# Altium PCB FAR_Small_PCB_V1_0.PcbDoc
Units mm, origin at the board's own origin, x right, y up, seen from the top; angles counter-clockwise.
Board outline 86.87 x 139.83 mm, 4 copper layers (Top Layer, Mid-Layer 1, Mid-Layer 2, Bottom Layer); 66 components, 61 nets, 277 pads, 4 vias.
Unrouted connection lines stored in the file: 197.
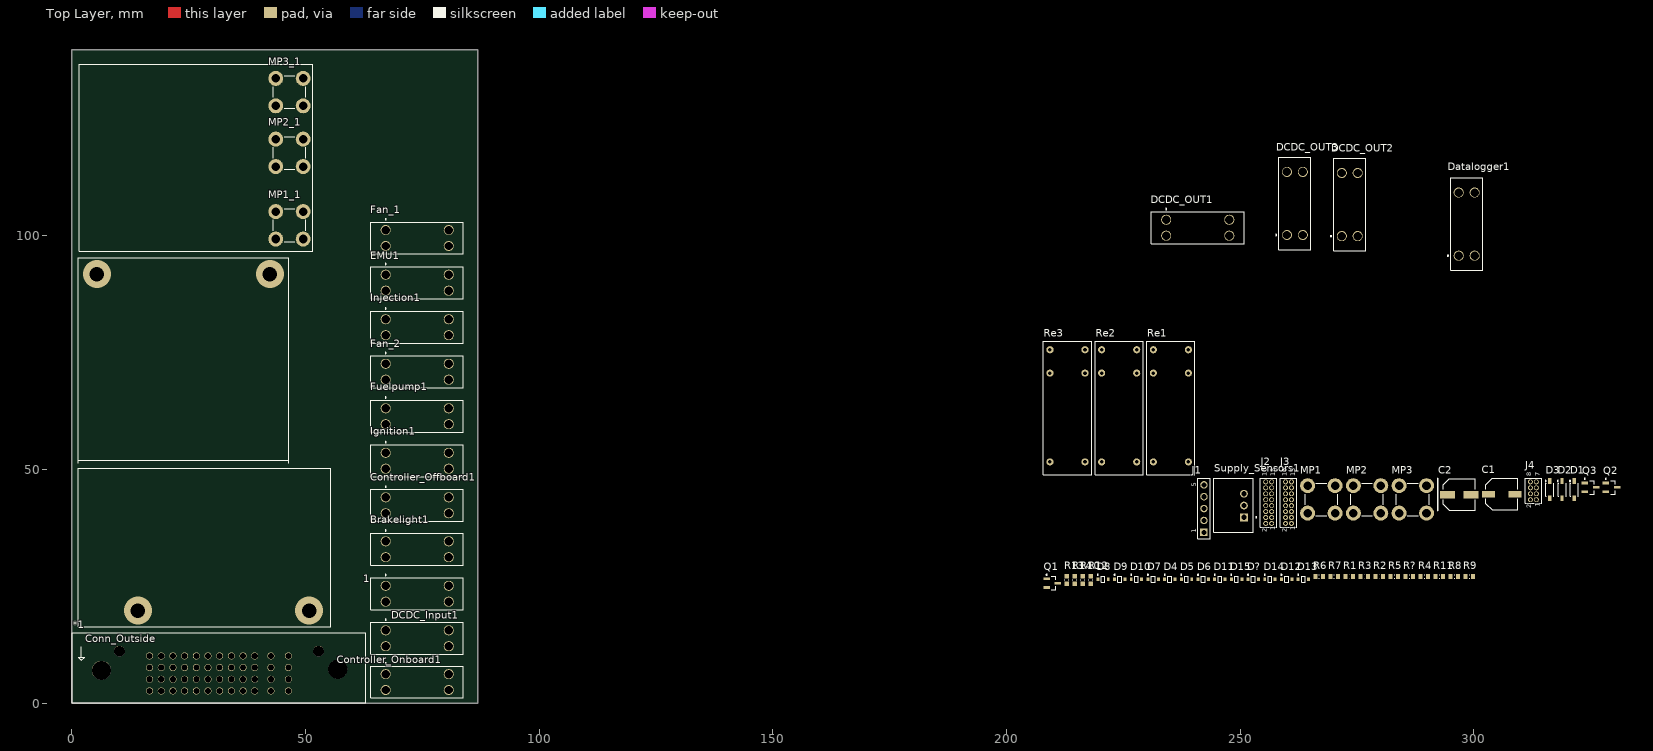
[diagram p0: Top Layer view]
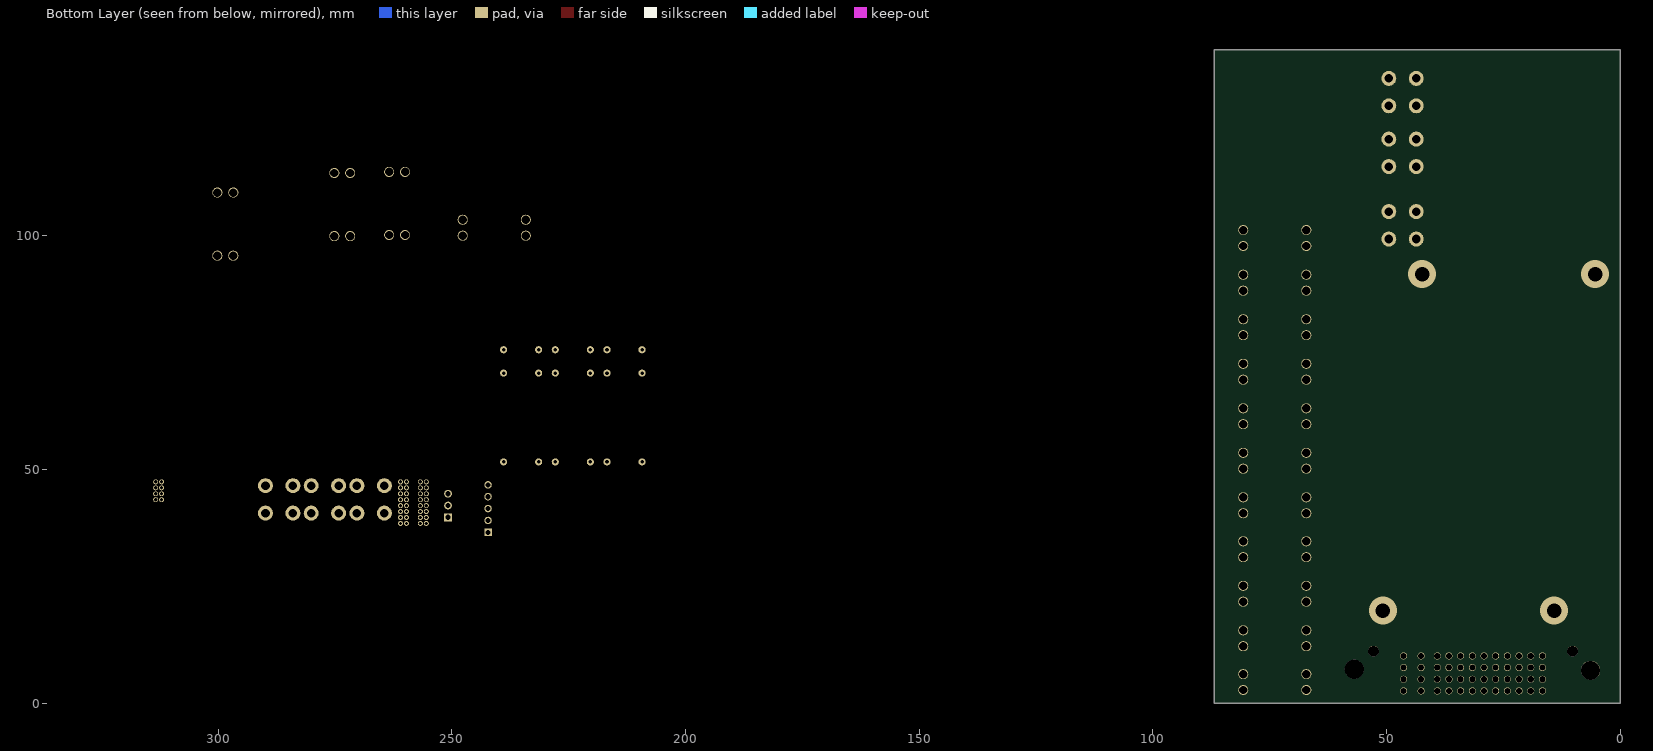
[diagram p1: Bottom Layer view, seen from below]

## Layer stack, top to bottom
Top Solder: solder mask 0.0102, Solder Resist, Dk 3.5
Top Layer: signal copper 0.0356
Dielectric 1: dielectric 0.32, FR-4, Dk 4.8
Mid-Layer 1: signal copper 0.0356
Dielectric3: dielectric 0.32, FR-4, Dk 4.8
Mid-Layer 2: signal copper 0.0356
Dielectric2: dielectric 0.32, FR-4, Dk 4.8
Bottom Layer: signal copper 0.0356
Bottom Solder: solder mask 0.0102, Solder Resist, Dk 3.5

## Board outline
0,0 86.868,0 86.868,139.827 0,139.827

## Design rules (kind name [scope] priority, off if disabled: settings)
Clearance [All] p1: gap=0.254 ignorepadtopadclearanceinfootprint=FALSE except(0: Arc-Hole Track-Hole SMDPad-Hole THPad-Hole Via-Hole Fill-Hole Poly-Hole Region-Hole Text-Hole)
PolygonConnect [All] p1: connectstyle=Relief reliefconductorwidth=0.254 reliefentries=4 polygonreliefangle="90 Angle" airgapwidth=0.254
RoutingVias [All] p1: holewidth=0.711 width=1.27 viastyle="Through Hole" minholewidth=0.711 minwidth=1.27 maxholewidth=0.711 maxwidth=1.27
SolderMaskExpansion [All] p1: expansion=0.102 istentingtop=FALSE
Width [All] p1: maxlimit=0.254 minlimit=0.254 preferedwidth=0.254
30 further rules are at their usual default settings.

## Classes and differential pairs
component class Fused_Inputs: D4 D5 D6 D7 D8 D9 D10 D11 D12 D13 D14 D15 D? R3 R4 R5 R6 R7 R8 R9 R10 R11 R12 R13 R14 R?
component class FAR_SMALL: 1 *1 Brakelight1 C1 C2 Controller_Offboard1 Controller_Onboard1 D1 D2 D3 Datalogger1 DCDC_Input1 DCDC_OUT1 DCDC_OUT2 DCDC_OUT3 EMU1 Fan_1 Fan_2 Fuelpump1 Ignition1 Injection1 J1 J2 J3 J4 MP1 MP2 MP3 Q1 Q2 Q3 R1 R2 Re1 Re2 Re3 Supply_Sensors1

## Components (designator, comment, footprint, x,y, rotation, side; value= is the part's Value field where it differs from the comment)
1 "3557-2" KSTN-3557-2 73.933,23.417 r0 top
*1 "Molex48PIN" PCBComponent_1 46.377,10.127 r0 top
Brakelight1 "3557-2" KSTN-3557-2 73.933,32.942 r0 top
C1 "EEEFK1C101P" PNSC-EEEFK1C101P_L 305.956,44.735 r0 top
C2 "EEEFK1E101XP" PNSC-FK-V-D8_V 296.87,44.635 r0 top
Controller_Offboard1 "3557-2" KSTN-3557-2 73.933,42.34 r0 top
Controller_Onboard1 "3557-2" KSTN-3557-2 73.933,4.523 r0 top
D1 "BAT46W-7-F" DIOD-SOD-123-2_V 321.464,45.683 r90 top
D2 "BAT46W-7-F" DIOD-SOD-123-2_V 318.856,45.683 r90 top
D3 "BAT46W-7-F" DIOD-SOD-123-2_V 316.248,45.683 r90 top
D4 "MM3Z4V7T1G" ONSC-SOD-323-2-477-02_V 234.944,26.512 r0 top
D5 "MM3Z4V7T1G" ONSC-SOD-323-2-477-02_V 238.516,26.512 r0 top
D6 "MM3Z4V7T1G" ONSC-SOD-323-2-477-02_V 242.087,26.512 r0 top
D7 "MM3Z4V7T1G" ONSC-SOD-323-2-477-02_V 231.373,26.512 r0 top
D8 "MM3Z4V7T1G" ONSC-SOD-323-2-477-02_V 220.66,26.512 r0 top
D9 "MM3Z4V7T1G" ONSC-SOD-323-2-477-02_V 224.231,26.512 r0 top
D10 "MM3Z4V7T1G" ONSC-SOD-323-2-477-02_V 227.802,26.512 r0 top
D11 "MM3Z4V7T1G" ONSC-SOD-323-2-477-02_V 245.658,26.512 r0 top
D12 "MM3Z4V7T1G" ONSC-SOD-323-2-477-02_V 259.943,26.512 r0 top
D13 "MM3Z4V7T1G" ONSC-SOD-323-2-477-02_V 263.514,26.512 r0 top
D14 "MM3Z4V7T1G" ONSC-SOD-323-2-477-02_V 256.372,26.512 r0 top
D15 "MM3Z4V7T1G" ONSC-SOD-323-2-477-02_V 249.229,26.512 r0 top
D? "MM3Z4V7T1G" ONSC-SOD-323-2-477-02_V 252.8,26.512 r0 top
Datalogger1 "3557-2" KSTN-3557-2 298.45,102.489 r90 top
DCDC_Input1 "3557-2" KSTN-3557-2 73.933,13.892 r0 top
DCDC_OUT1 "3557-2" KSTN-3557-2 240.919,101.727 r0 top
DCDC_OUT2 "3557-2" KSTN-3557-2 273.431,106.68 r90 top
DCDC_OUT3 "3557-2" KSTN-3557-2 261.698,106.915 r90 top
EMU1 "3557-2" KSTN-3557-2 73.933,89.965 r0 top
Fan_1 "3557-2" KSTN-3557-2 73.933,99.519 r0 top
Fan_2 "3557-2" KSTN-3557-2 73.933,70.915 r0 top
Fuelpump1 "3557-2" KSTN-3557-2 73.933,61.39 r0 top
Ignition1 "3557-2" KSTN-3557-2 73.933,51.865 r0 top
Injection1 "3557-2" KSTN-3557-2 73.933,80.44 r0 top
J1 "61300511121" 61300511121 242.249,41.635 r90 top
J2 "62201621121" 62201621121 256.085,42.905 r90 top
J3 "62201621121" 62201621121 260.343,42.905 r90 top
J4 "62200821121" 62200821121 312.715,45.445 r90 top
MP1 "M3x5mm" 74651173 267.363,43.598 r0 top
MP1_1 "M3x5mm" 74651173 46.609,102.235 r180 top (schematic designator MP1)
MP2 "M3x5mm" 74651173 277.144,43.598 r0 top
MP2_1 "M3x5mm" 74651173 46.609,117.735 r180 top (schematic designator MP2)
MP3 "M3x5mm" 74651173 286.925,43.598 r0 top
MP3_1 "M3x5mm" 74651173 46.609,130.735 r180 top (schematic designator MP3)
Q1 "50C02CH-TL-E" ONSC-CPH-3_V 209.774,25.677 r0 top
Q2 "50C02CH-TL-E" ONSC-CPH-3_V 329.435,46.185 r0 top
Q3 "50C02CH-TL-E" ONSC-CPH-3_V 324.924,46.185 r0 top
R1 "10K 5% 0603(1608)" RESC0603(1608)_N 273.328,27.125 r0 top value="10000.00 Ohm"
R2 "10K 5% 0603(1608)" RESC0603(1608)_N 279.75,27.125 r0 top value="10000.00 Ohm"
R3 "10k 0603" RESC0603(1608)_N 276.539,27.125 r0 top value="10000.00 Ohm"
R4 "10k 0603" RESC0603(1608)_N 289.383,27.125 r0 top value="10000.00 Ohm"
R5 "10k 0603" RESC0603(1608)_N 282.961,27.125 r0 top value="10000.00 Ohm"
R6 "10k 0603" RESC0603(1608)_N 266.905,27.125 r0 top value="10000.00 Ohm"
R7 "10k 0603" RESC0603(1608)_N 270.116,27.125 r0 top value="10000.00 Ohm"
R8 "10k 0603" RESC0603(1608)_N 295.806,27.125 r0 top value="10000.00 Ohm"
R9 "10k 0603" RESC0603(1608)_N 299.017,27.125 r0 top value="10000.00 Ohm"
R10 "10k 0603" RESC0603(1608)_N 216.307,26.375 r90 top value="10000.00 Ohm"
R11 "10k 0603" RESC0603(1608)_N 292.595,27.125 r0 top value="10000.00 Ohm"
R12 "10k 0603" RESC0603(1608)_N 218.018,26.375 r90 top value="10000.00 Ohm"
R13 "10k 0603" RESC0603(1608)_N 212.885,26.375 r90 top value="10000.00 Ohm"
R14 "10k 0603" RESC0603(1608)_N 214.596,26.375 r90 top value="10000.00 Ohm"
R? "10k 0603" RESC0603(1608)_N 286.172,27.125 r0 top value="10000.00 Ohm"
Re1 "Ignition" "Finder 436190120300" 238.923,51.62 r90 top
Re2 "Injection" "Finder 436190120300" 227.861,51.62 r90 top
Re3 "Fuelpump" "Finder 436190120300" 216.799,51.62 r90 top
Supply_Sensors1 "R-78E5.0-0.5" REPO-R-78E-0.5-3_V 250.802,42.285 r90 top

## Footprints (in the part's own frame and the unit in brackets; to place one, negate y for a bottom-side part, rotate by r counter-clockwise, add the part's x,y. Pads: shape width x height; smd on the part's side, far side on the other; paste and mask are expansions set on the pad)
74651173 [mm] "Shank, THR, 4 pins, 7x7mm, M3, thread 5mm"
  round 3.2 hole 1.85: 1(-2.935,-2.935) 1(-2.935,2.935) 1(2.935,-2.935) 1(2.935,2.935)
  silkscreen extent -3.5,-3.5 3.5,3.5, body extent -3.5,-3.5 3.5,3.5, height 8.5
61300511121 [mm] "Pin Header, pitch 2.54 mm, THT, Vertical, single row, 5p"
  rect 1.6x1.6 hole 1.1: 1(-5.08,0)
  round 1.6 hole 1.1: 2(-2.54,0) 3(0,0) 4(2.54,0) 5(5.08,0)
  silkscreen extent -6.5,-1.35 6.5,1.35, body extent -6.35,-1.27 6.35,1.27, height 8.57
62200821121 [mm] "Pin Header, pitch 1.27 mm, THT, Vertical, dual row, 8p"
  round 1.05 hole 0.7: 1(-1.905,-0.635) 2(-1.905,0.635) 3(-0.635,-0.635) 4(-0.635,0.635) 5(0.635,-0.635) 6(0.635,0.635) 7(1.905,-0.635) 8(1.905,0.635)
  silkscreen extent -2.69,-1.78 2.69,1.78, body extent -2.54,-1.7 2.54,1.7, height 5.33
62201621121 [mm] "Pin Header, pitch 1.27 mm, THT, Vertical, dual row, 16p"
  round 1.05 hole 0.7: 1(-4.445,-0.635) 2(-4.445,0.635) 3(-3.175,-0.635) 4(-3.175,0.635) 5(-1.905,-0.635) 6(-1.905,0.635) 7(-0.635,-0.635) 8(-0.635,0.635) 9(0.635,-0.635) 10(0.635,0.635) 11(1.905,-0.635) 12(1.905,0.635) 13(3.175,-0.635) 14(3.175,0.635) 15(4.445,-0.635) 16(4.445,0.635)
  silkscreen extent -5.23,-1.78 5.23,1.78, body extent -5.08,-1.7 5.08,1.7, height 5.33
DIOD-SOD-123-2_V [mm] "SOD-123, 2-Leads, Body 2.85x1.7mm (max), Pitch 3.7mm"
  rect 1.2x0.7 smd: 1(-1.85,0) 2(1.85,0)
  silkscreen extent -1.43,-0.85 1.97,1.02, body extent -1.42,-0.85 1.43,0.85, height 1.45
"Finder 436190120300" [mil] "Relais 5mm"
  round 60 hole 30: 1(0,295.28) 2(0,0) 3(748.03,0) 4(944.88,0) 5(748.03,295.28) 6(944.88,295.28)
  silkscreen extent -108,-55 1018,350, body extent -105,-49 1013,344, height 537
KSTN-3557-2 [mm] "Fuse Holder, PCB Mount, Thru-Hole, Body 19.8x6.8mm, Height 7.4mm"
  round 2.15 hole 1.8: 1(-6.75,1.7) 2(-6.75,-1.7) 3(6.75,1.7) 4(6.75,-1.7)
  silkscreen extent -9.9,-3.4 9.9,4.12, body extent -9.91,-3.37 9.91,3.37, height 7.74
ONSC-CPH-3_V [mm] "SOT23, 3-Leads, Body 2.9x1.6mm, Pitch 0.95mm"
  rect 1.4x0.6 smd: 1(-1.2,0.95) 2(-1.2,-0.95) 3(1.2,0)
  silkscreen extent -1.32,-1.45 0.8,1.92, body extent -0.8,-1.45 0.8,1.45, height 1.05
ONSC-SOD-323-2-477-02_V [mm] "SOD, 2-Leads, Body 1.7x1.25mm"
  rect 0.63x0.83 smd: 1(-1.115,0) 2(1.115,0)
  silkscreen extent -1.24,-0.67 0.4,1.09, body extent -0.85,-0.63 0.85,0.63, height 1.06
PCBComponent_1 [mm]
  round 1.5 hole 1.3: 1(-29.7,0) 2(-27.2,0) 3(-24.7,0) 4(-22.2,0) 5(-19.7,0) 6(-17.2,0) 7(-14.7,0) 8(-12.2,0) 9(-9.7,0) 10(-7.2,0) 11(-3.75,0) 12(0,0) 13(-29.7,-2.5) 14(-27.2,-2.5) 15(-24.7,-2.5) 16(-22.2,-2.5) 17(-19.7,-2.5) 18(-17.2,-2.5) 19(-14.7,-2.5) 20(-12.2,-2.5) 21(-9.7,-2.5) 22(-7.2,-2.5) 23(-3.75,-2.5) 24(0,-2.5) 25(-29.7,-5) 26(-27.2,-5) 27(-24.7,-5) 28(-22.2,-5) 29(-19.7,-5) 30(-17.2,-5) 31(-14.7,-5) 32(-12.2,-5) 33(-9.7,-5) 34(-7.2,-5) 35(-3.75,-5) 36(0,-5) 37(-29.7,-7.5) 38(-27.2,-7.5) 39(-24.7,-7.5) 40(-22.2,-7.5) 41(-19.7,-7.5) 42(-17.2,-7.5) 43(-14.7,-7.5) 44(-12.2,-7.5) 45(-9.7,-7.5) 46(-7.2,-7.5) 47(-3.75,-7.5) 48(0,-7.5)
  round 4.1 hole 4.1: 50(-40,-3.1) 50(10.55,-2.85)
  round 2.3 hole 2.3: 50(-36.15,1) 50(6.45,1)
  silkscreen extent -46.25,-10 16.55,5
PNSC-EEEFK1C101P_L [mm] "Aluminum Electrolytic Capacitor, Body 6.8x6.8mm, IPC High Density"
  rect 2.85x1.4 smd: 1(-2.85,0) 2(2.85,0)
  silkscreen extent -3.4,-3.4 3.4,3.4, body extent -3.9,-3.4 3.9,3.4, height 6.3
PNSC-FK-V-D8_V [mm] "CAPAE, 2-Leads, Body 6.80x6.80mm"
  rect 3.2x1.6 smd: 1(-2.5,0) 2(2.5,0)
  silkscreen extent -4.6,-3.4 3.4,3.4, body extent -3.9,-3.4 3.9,3.4, height 8
REPO-R-78E-0.5-3_V [mm] "THD, 3-Leads, Body 11.6x8.5mm, Pitch 2.54mm"
  rect 1.65x1.65 hole 1.15: 1(-2.54,0)
  round 1.65 hole 1.15: 2(0,0) 3(2.54,0)
  silkscreen extent -5.75,-2.78 5.85,6.5, body extent -5.75,-2 5.85,6.5, height 10.4
RESC0603(1608)_N [mm] "Chip Resistor, Body 1.6x0.8mm, IPC Medium Density"
  rect 0.9x1 smd: 1(-0.8,0) 2(0.8,0)
  silkscreen extent -0.05,-0.4 0.05,0.4, body extent -0.85,-0.47 0.85,0.47, height 0.6

## Part data
1 Brakelight1 Controller_Offboard1 Controller_Onboard1 Datalogger1 DCDC_Input1 DCDC_OUT1 DCDC_OUT2 DCDC_OUT3 EMU1 Fan_1 Fan_2 Fuelpump1 Ignition1 Injection1: library part CMP-2000-05461-1, "FUSE HOLDER, PCB MOUNT, 500VAC, 20A, ROHS", Current Rating=30A, Manufacturer=Keystone-Electronics, Voltage=500V, Category=CircuitProtection, Contact Finish=TinNickel, Contact Material=Brass, Datasheet URL=http://datasheet.octopart.com/3557-2-Keystone-datasheet-15715937.pdf, Datasheet Version=Apr-13, Family=Fuseholders, For Use With/Related Products=ATC,ATO257,MINI897, Fuse Size="0.43\"Lx0.15\"Wx0.64\"H(10.92mmx3.81mmx16.25mm)", Fuse Type=Blade, Fuseholder Type=Block, Manufacturer URL=http://www.keyelco.com/, Mounting Type=PCB, Number of Circuits=1, Orientation=Vertical, Series=-, Termination Style=PCPin
C1: library part CMP-2000-06203-1, "Aluminum Electrolytic Capacitor, 100 uF, 20%, 16 V, -55 to 105 degC, 2-Pin SMD, RoHS, Tape and Reel", Capacitance=100µF, Case Size/Dimension=Ø6.3x5.8mm, Lifetime@Temperature=2000Hrs@105°C, Manufacturer=Panasonic, Operating Temp Range=-55to+105°C, Operating Temp-Max=105°C, Package Description="2-Pin Surface Mount Device, Body 6.6 x 6.6 mm", Rated Voltage=16V, Ripple Current=240mA, Datasheet URL=http://datasheet.octopart.com/EEEFK1C101P-Panasonic-datasheet-13266987.pdf, Datasheet Version=11/2012, Impedance=0.36O, Manufacturer URL=http://www.panasonic.com/, Mounting Technology=SurfaceMount, Package Reference=EEEFK1C101P, Series=FK, Type=Can
C2: library part CMP-2000-06206-1, "Aluminum Electrolytic Capacitor, 100 uF, +/- 20%, 25 V, 2-Pin SMD (Size Code D8), -55 to 105 degC, RoHS, Tape and Reel", Capacitance=100µF, Case Size/Dimension=Ø6.3x7.7mm, Lifetime@Temperature=2000Hrs@105°C, Manufacturer=Panasonic, Operating Temp Range=-55to+105°C, Operating Temp-Max=105°C, Package Description="2-Pin Electrolytic Aluminum Capacitor, Body 6.6 x 6.6 mm", Package Reference=FK-V-D8, Rated Voltage=25V, Ripple Current=280mA, Datasheet URL=http://industrial.panasonic.com/cdbs/www-data/pdf/RDE0000/ABA0000C1181.pdf, Datasheet Version=03/2016, Impedance=0.34O, Manufacturer URL=http://www.panasonic.com/, Mounting Technology=SurfaceMount, Package URL=http://industrial.panasonic.com/cdbs/www-data/pdf/RDE0000/DME0000COL48.pdf, Series=FK, Type=Can
D1 D2 D3: library part CMP-0303-00004-1, "Surface Mount Schottky Barrier Diode, 100 V, -55 to 125 degC, 2-Pin SOD123, RoHS, Tape and Reel", Manufacturer="Diodes Inc", Operating Temperature="-55 to 125 degC", ComponentLink1Description="Manufacturer URL", ComponentLink1URL=http://www.diodes.com/, ComponentLink2Description=Datasheet, ComponentLink2URL=http://diodes.com/datasheets/ds30044.pdf, ComponentLink3Description="Package Specification", ComponentLink3URL=http://diodes.com/datasheets/ds30044.pdf, CT@1 V="12 pF Typ.", DatasheetVersion="Rev. 16-2", IR@1.5 V="0.3 uA Max.", Mounting Technology="Surface Mount", PackageDescription="2-Pin SMD, Body 2.7 x 1.55 mm, Height 1.45 mm", Packing="Tape and Reel", PartNumber=BAT46W-7-F, RoHS=TRUE, V(BR)R="100 V Min.", VF@10 mA="0.45 V Max."
D4 D5 D6 D7 D8 D9 D10 D11 D12 D13 D14 D15 D?: library part CMP-1060-00657-1, "Zener Voltage Regulator, 300 mW, 2-Pin SOD-323, Pb-Free, Tape and Reel", Manufacturer="On Semiconductor", ComponentLink1Description="Manufacturer URL", ComponentLink1URL=http://www.onsemi.com/, ComponentLink2Description=Datasheet, ComponentLink2URL=http://www.onsemi.cn/pub_link/Collateral/MM3Z2V4T1-D.PDF, ComponentLink3Description="Package Specification", ComponentLink3URL=http://www.onsemi.com/pub_link/Collateral/477-02.PDF.1, DatasheetVersion="Rev. 9", Mounting Technology="Surface Mount", P Max (W)=0.3, PackageDescription="2-Pin SOD, Body 1.7 x 1.25 mm", PackageReference=SOD-323-2-477-02, PackageVersion="Rev. H, 03/2007", Packing="Tape and Reel", PartNumber=MM3Z4V7T1G, RoHS=Pb-Free, VZ Typ (V)=4.7
J1: "WR-PHD Pin Header, THT, pitch 2.54mm, Single Row, Vertical, 5pin", Contact Resistance=20mOhm, Operating Temperature="-40 to +105degC", Rated Current=3A, Withstanding Voltage=500VAC, Working Voltage=250VAC, ComponentLink1Description=Manufacturer, ComponentLink1URL=http://www.we-online.de, ComponentLink2Description=Datasheet, ComponentLink2URL=https://katalog.we-online.de/em/datasheet/6130xx11121.pdf, Gender=Male, Mounting Technology=THT, Orientation=Vertical, Packaging=Bag, Part Number=61300511121, Pin Number=5, Pitch=2.54mm, Published Date="June 2019", Publisher="Wurth Elektronik", Row Number=Single
J2 J3: library part CMP-1502-00950-1, "THT Vertical Pin Header WR-PHD, Pitch 1.27 mm, Dual Row, 16 pins", Contact Resistance=20mOhm, Manufacturer="Wurth Elektronik", Operating Temperature=-40to105degC, Rated Current=1A, Withstanding Voltage=500VAC, Working Voltage=100VAC, Datasheet URL=https://katalog.we-online.de/em/datasheet/62201621121.pdf, Gender=Male, Manufacturer URL=http://www.we-online.de, Mounting Technology=THT, Orientation=Vertical, Package Reference=62201621121, Packaging=Box, Part Number=62201621121, Pin Number=16, Pitch=1.27mm, Publisher=WurthElektronik, Row Number=Dual
J4: library part CMP-1502-00947-1, "THT Vertical Pin Header WR-PHD, Pitch 1.27 mm, Dual Row, 8 pins", Contact Resistance=20mOhm, Manufacturer="Wurth Elektronik", Operating Temperature=-40to105degC, Rated Current=1A, Withstanding Voltage=500VAC, Working Voltage=100VAC, Datasheet URL=https://katalog.we-online.de/em/datasheet/62200821121.pdf, Gender=Male, Manufacturer URL=http://www.we-online.de, Mounting Technology=THT, Orientation=Vertical, Package Reference=62200821121, Packaging=Box, Part Number=62200821121, Pin Number=8, Pitch=1.27mm, Publisher=WurthElektronik, Row Number=Dual
MP1 MP1_1 MP2 MP2_1 MP3 MP3_1: library part 74651173, "WP-THRSH REDCUBE THR with external thread, 7x7mm, M3x5mm, 4 pins, 50A", Operating Temperature="-55 to +150degC", Rated Current=50A, ComponentLink1Description=Manufacturer, ComponentLink1URL=http://www.we-online.de, ComponentLink2Description=Datasheet, ComponentLink2URL=https://katalog.we-online.com/em/datasheet/74651173.pdf, Height=8.5mm, Material=Brass, Mounting Technology=SMT, Packaging=Bulk, Part Number=74651173, Pin Number=4, Published Date="September 2019", Publisher="Wurth Elektronik", Size=7x7mm, Surface=Tin, Thread=M3, Thread Length=5mm
Q1 Q2 Q3: library part CMP-1048-00075-1, "Bipolar Transistor, 50 V, 0.5 A, Low VCE(sat), NPN Single, 3-Pin CPH, Pb-Free, Tape and Reel", Manufacturer="On Semiconductor", ComponentLink1Description="Manufacturer URL", ComponentLink1URL=http://www.onsemi.com/, ComponentLink2Description=Datasheet, ComponentLink2URL=http://www.onsemi.com/pub_link/Collateral/50C02CH-D.PDF, ComponentLink3Description="Package Specification", ComponentLink3URL=http://www.onsemi.com/pub_link/Collateral/50A02CH-D.PDF, IC Continuous (A)=0.5, Mounting Technology="Surface Mount", PackageDescription="3-Pin Small Outline Transistor, Body 2.9 x 1.6 mm, Pitch 0.95 mm", PackageReference=CPH-3, Packing="Tape and Reel", PartNumber=50C02CH-TL-E, Polarity=NPN, RoHS=TRUE
R1 R2 R3 R4 R5 R6 R7 R8 R9 R10 R11 R12 R13 R14 R?: library part CMP-1012-00098-1, "10K 0.1W 5% 0603 (1608 Metric)  SMD", Case-EIA=0603, Case-Metric=1608, Power="0.1 W", Tolerance="5 %", Technology=SMT
Re1 Re2 Re3: library part "Finder 4361-0300", "1 Schließer, 16A"
Supply_Sensors1: library part CMP-2000-06922-2, "DC/DC-Converter, 5 V Single Output, 500 mA, -40 to 85 degC, 3-Pin THD, RoHS, Tube", Current - Output (Max)=500mA, Manufacturer="Recom Power", Operating Temperature=-40°C~85°C, Package Description="3-Pin Through Hole Device, Body 11.6 x 8.5 mm, Pitch 2.54 mm", Package Reference="SIP Module", Package Version="Rev. 0", Datasheet URL=http://www.recom-power.com/pdf/Innoline/R-78Exx-0.5.pdf, Datasheet Version=01/2017, Efficiency=92%, Manufacturer URL=http://www.recom-power.com/us/americas/home.html, Mounting Technology=ThroughHole, Number of Outputs=1, Packaging=Tube, VIN Max=28V, VIN Min=7V, VOUT=5V

## Via types
v1: diameter 6, hole 3.1, Top Layer to Bottom Layer, 4 vias

## Nets (pads, with @x,y where several pads share a name; then routed paths per layer and width w, separated by ;. In a path a pad name is that pad's centre, name@x,y a point inside that pad or via, vN(x,y) a via of type N, cw(c..) or ccw(c..) an arc to the next point about the centre after c; other vN are vias at no path point)
5V_out: *1.8 *1.9 *1.10 *1.38 C1.1 J1.3 Supply_Sensors1.3
12V_fused: 1.1 1.2 *1.20 *1.21 *1.22 C2.1 J1.2 Supply_Sensors1.1
12V_in: 1.3 1.4 *1.11 *1.12 Brakelight1.3 Brakelight1.4 Controller_Offboard1.3 Controller_Offboard1.4 Controller_Onboard1.3 Controller_Onboard1.4 Datalogger1.3 Datalogger1.4 DCDC_Input1.3 DCDC_Input1.4 EMU1.3 EMU1.4 Fan_1.3 Fan_1.4 Fan_2.3 Fan_2.4 Fuelpump1.3 Fuelpump1.4 Ignition1.3 Ignition1.4 Injection1.3 Injection1.4
Analog_in1: *1.1 J2.8
Analog_in2: *1.13 J2.10
Analog_in3: *1.25 J2.12
Analog_in4: *1.37 J2.14
Backlight_Fuse_in: D5.1 J3.13 R4.1
Brakelight_fused: *1.42 Brakelight1.1 Brakelight1.2 R4.2
CAN_H: *1.32 *1.33 *1.34 J2.2 J4.1
CAN_L: *1.44 *1.45 *1.46 J2.4 J4.3
Controller_Fuse_in: D4.1 J3.14 R3.1
Controller_Fused: Controller_Offboard1.1 Controller_Offboard1.2 R3.2
Controller_Onboard_Fused: Controller_Onboard1.1 Controller_Onboard1.2 J2.1 J3.1
Datalogger_Fused: Datalogger1.1 Datalogger1.2 R9.2
Datenlogger_Fuse_in: D10.1 J3.12 R9.1
DCDC_Fused_in: D11.1 R10.1
DCDC_Fused_Input: DCDC_Input1.1 DCDC_Input1.2 MP1.1 R10.2
DCDC_Input_Fuse: J3.3
DCDC_OUT: DCDC_OUT1.3 DCDC_OUT1.4 DCDC_OUT2.3 DCDC_OUT2.4 DCDC_OUT3.3 DCDC_OUT3.4 MP3.1
DCDC_OUT1: *1.5 DCDC_OUT1.1 DCDC_OUT1.2 R11.2
DCDC_OUT2: *1.17 DCDC_OUT2.1 DCDC_OUT2.2 R12.2
DCDC_OUT3: *1.29 DCDC_OUT3.1 DCDC_OUT3.2 R13.2
Digital_1: *1.4 J2.7
Digital_2: *1.16 J2.5
Digital_3: *1.28 J2.3
Emu_Fuse_in: D15.1 J3.11 R14.1
Emu_fused: EMU1.1 EMU1.2 R14.2
ETC_In: *1.41 R1.1
Fan1_CTRL: *1.14 J4.2
Fan1_Fuse_in: D6.1 J3.2 R5.1
Fan1_fused: *1.47 Fan_2.1 Fan_2.2 R5.2
Fan2_CTRL: *1.15 J4.4
Fan2_Fuse_in: D?.1 J3.4 R?.1
Fan2_Fused: *1.48 Fan_1.1 Fan_1.2 R?.2
Flatshift: *1.43 J2.13
FP_12V_out: *1.35 *1.36 Re3.4 Re3.6
FP_CTRL: D3.1 Q2.3 Re3.2
Fuelpump_CTRL: J4.5 R2.1
Fuelpump_Fuse_in: D9.1 J3.10 R8.1
Fuelpump_Fused: Fuelpump1.1 Fuelpump1.2 R8.2 Re3.3 Re3.5
Gear_Sensor_Digital: *1.39 J2.6
GND: *1.23 *1.24 C1.2 C2.2 D4.2 D5.2 D6.2 D7.2 D8.2 D9.2 D10.2 D11.2 D12.2 D13.2 D14.2 D15.2 D?.2 J1.5 J2.16 J3.16 J4.6 J4.8 MP2.1 Q1.2 Q3.2 Supply_Sensors1.2
IGN_12V_out: *1.6 *1.18 *1.30 Re1.4 Re1.6
IGN_INJ_CTRL: D1.1 D2.1 Q1.3 Re1.2 Re2.2
Ignition_Fuse_in: D7.1 J3.6 R6.1
Ignition_Fused: Ignition1.1 Ignition1.2 R6.2 Re1.3 Re1.5
INJ_12V_out: *1.7 *1.19 *1.31 Re2.4 Re2.6
Injection_Fuse_in: D8.1 J3.8 R7.1
Injection_Fused: Injection1.1 Injection1.2 R7.2 Re2.3 Re2.5
NetQ1_1: Q1.1 Q2.1 R1.2
NetQ2_2: Q2.2 Q3.3
NetQ3_1: Q3.1 R2.2
NWSU_IN: *1.26 J1.1
NWSU_OUT: *1.27 J1.4
Servo1_Fuse_in: D12.1 J3.5 R11.1
Servo2_Fuse_in: D13.1 J3.7 R12.1
Servo3_Fuse_in: D14.1 J3.9 R13.1
Servo_1: *1.2 J2.9
Servo_2: *1.3 J2.11
Shutdown_In: *1.40 D1.2 D2.2 D3.2 Re1.1 Re2.1 Re3.1
pads on no net: *1.50 J2.15 J3.15 J4.7 MP1_1.1 MP2_1.1 MP3_1.1
copper on no net:
  other v1: 14.2,19.812 50.8,19.812 5.418,91.821 42.418,91.821

## Silkscreen, mask and mechanical layers (free items; w line width, h text height)
Top Overlay:
  lines w0.254: 1.418,51.321 1.418,95.321 46.418,95.321 46.418,51.321 ; 1.501,52.003 46.501,52.003 ; 1.4,16.312 55.4,16.312 55.4,50.312 1.4,50.312 1.4,16.312 ; 1.609,96.735 51.609,96.735 51.609,136.735 1.609,136.735 1.609,96.735

## Text inside footprints (layer, text, board x,y; h text height)
*1: Top Overlay "Conn_Outside" at 2.881,13.085 h1.52
J1: Top Overlay "5" at 240.549,46.335 h1.02 r90; Top Overlay "1" at 240.549,36.435 h1.02 r90
J2: Top Overlay "1" at 257.485,36.995 h1.02 r90; Top Overlay "2" at 255.685,36.595 h1.02 r90; Top Overlay "16" at 255.685,48.515 h1.02 r90; Top Overlay "15" at 257.485,48.515 h1.02 r90
J3: Top Overlay "1" at 261.743,36.995 h1.02 r90; Top Overlay "2" at 259.943,36.595 h1.02 r90; Top Overlay "16" at 259.943,48.515 h1.02 r90; Top Overlay "15" at 261.743,48.515 h1.02 r90
J4: Top Overlay "2" at 312.315,41.675 h1.02 r90; Top Overlay "1" at 314.115,42.075 h1.02 r90; Top Overlay "8" at 312.315,48.515 h1.02 r90; Top Overlay "7" at 314.115,48.515 h1.02 r90